# Altium PCB PCB1.PcbDoc
Units mm, origin at the board's own origin, x right, y up, seen from the top; angles counter-clockwise.
Board outline 84 x 87 mm, 2 copper layers (Top Layer, Bottom Layer); 54 components, 55 nets, 211 pads, 46 vias.
Unrouted connection lines stored in the file: 35.
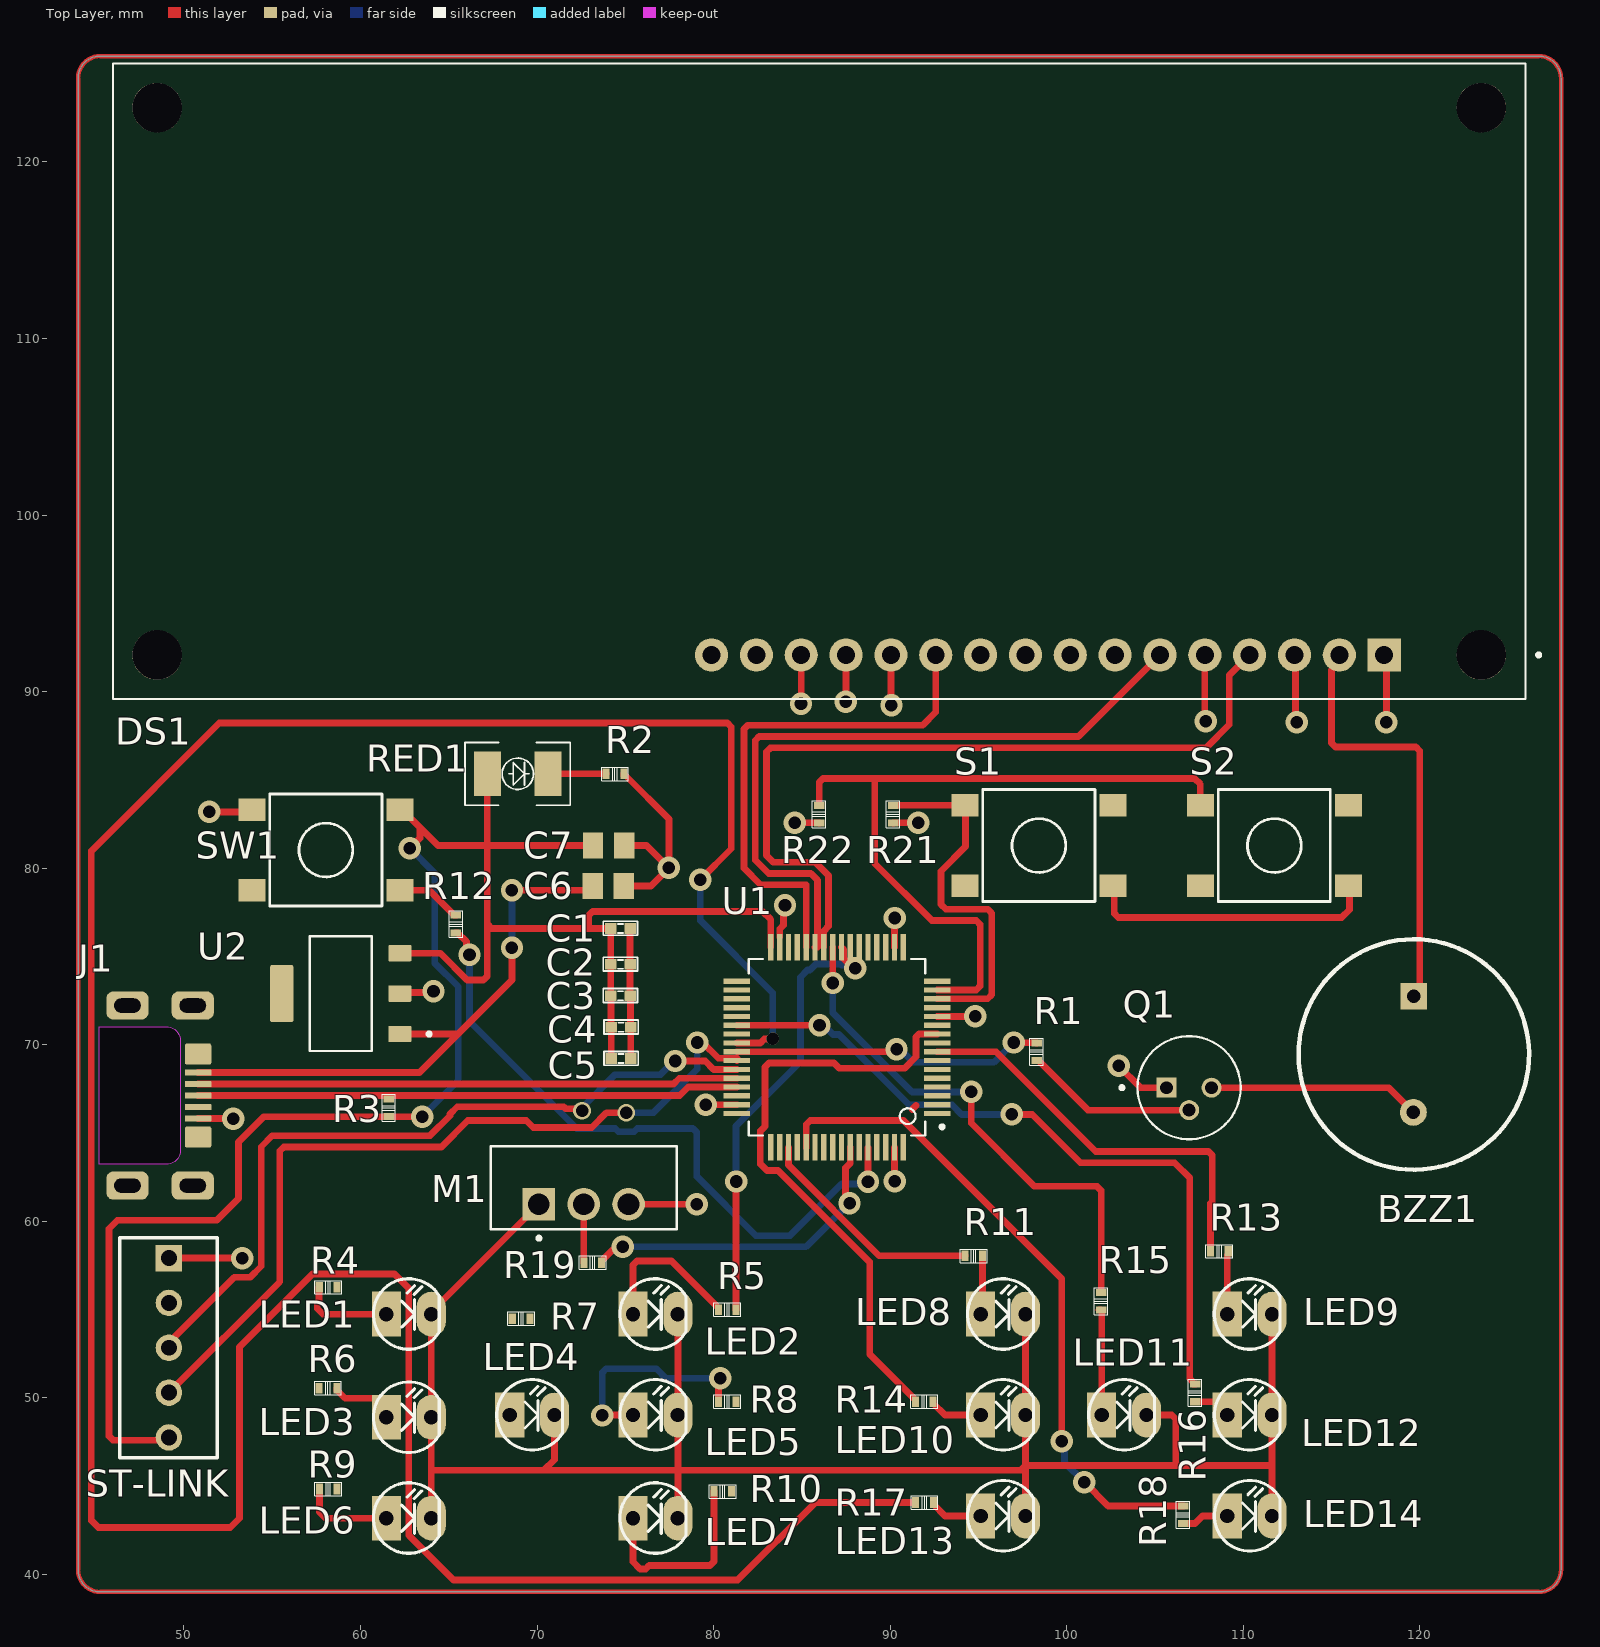
[diagram p0: Top Layer view]
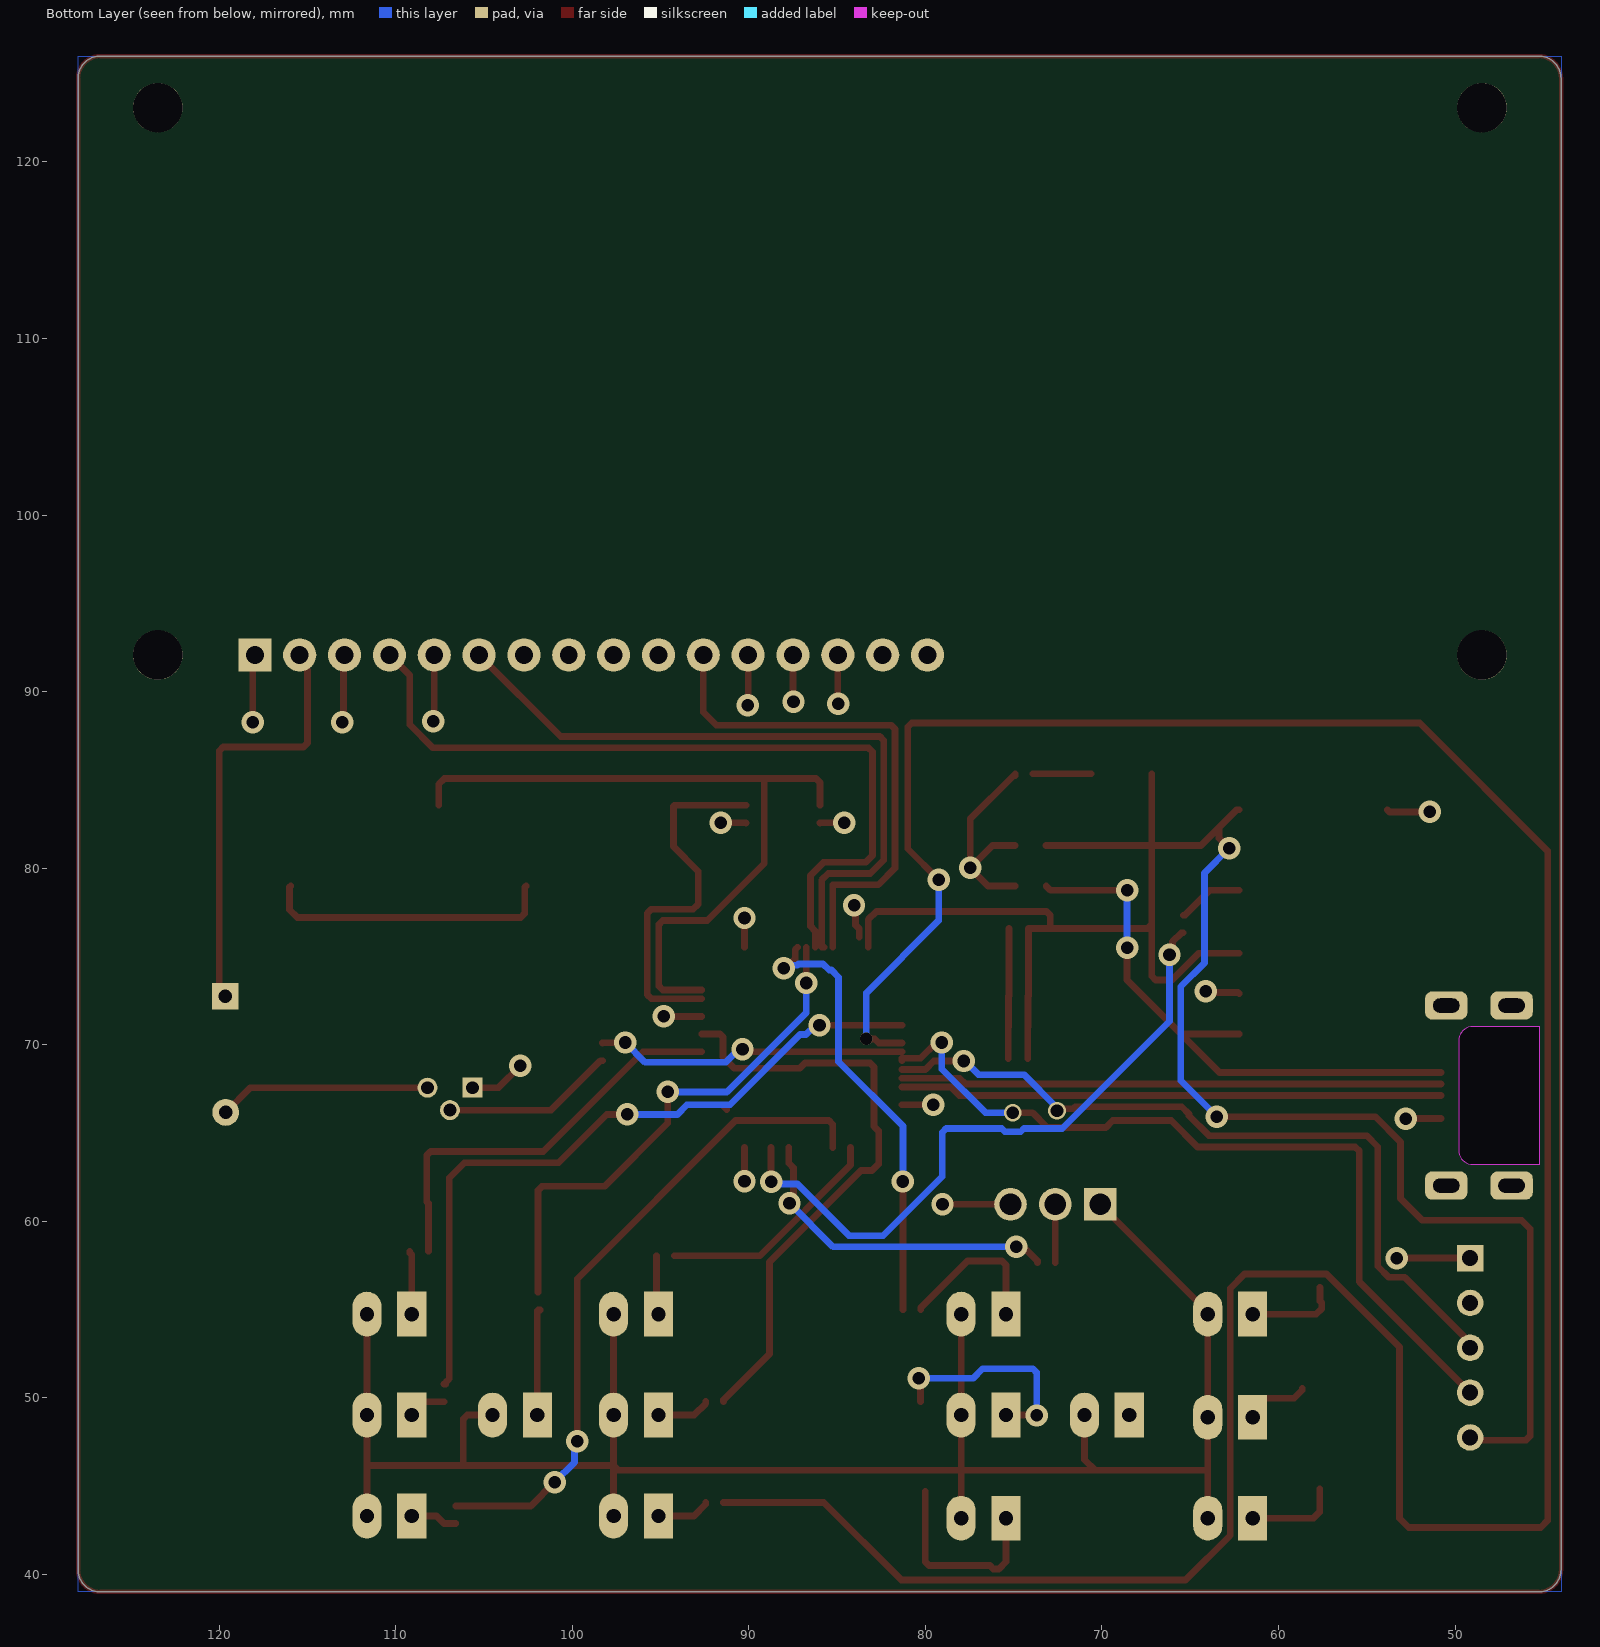
[diagram p1: Bottom Layer view, seen from below]
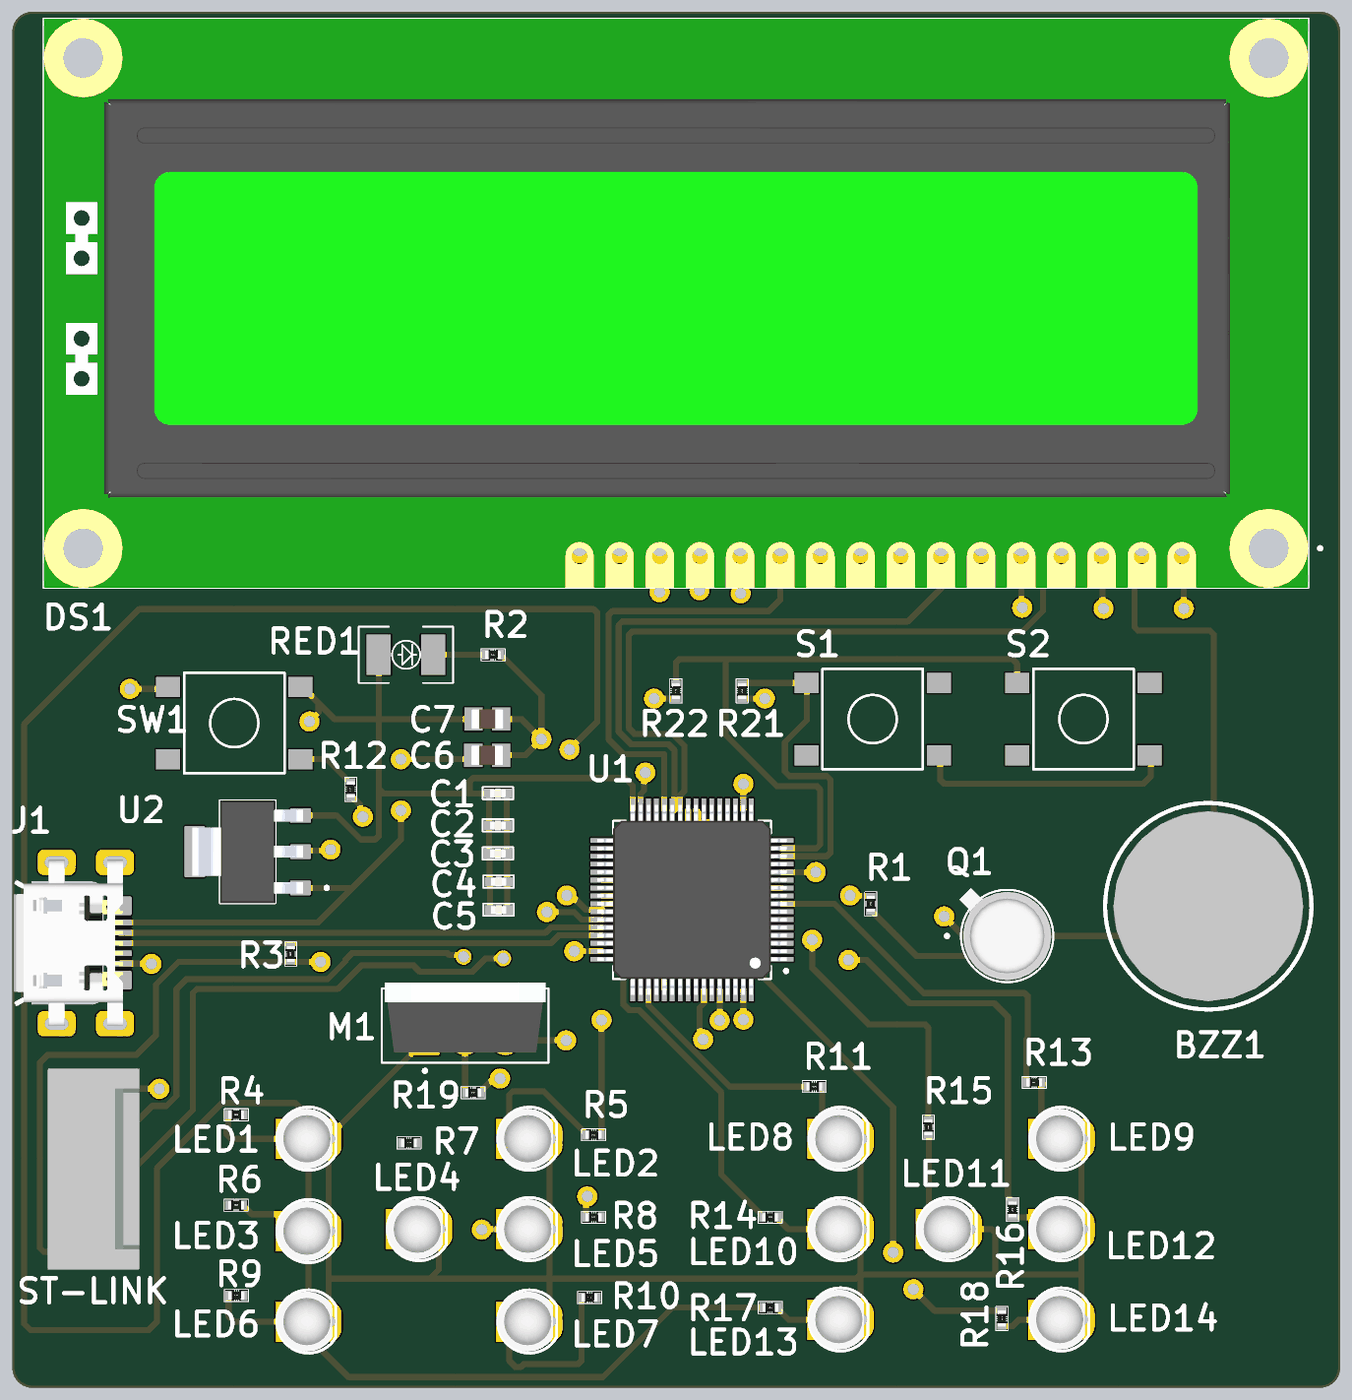
[diagram p2: 3D render of the assembled board from above, using the file's embedded part models]

## Layer stack, top to bottom
Top Solder: solder mask 0.0102, Solder Resist, Dk 3.5
Top Layer: signal copper 0.0356
Dielectric 1: dielectric 0.32, FR-4, Dk 4.8
Bottom Layer: signal copper 0.0356
Bottom Solder: solder mask 0.0102, Solder Resist, Dk 3.5

## Board outline
44,40.27 ccw(c45.27,40.27) 45.27,39 126.73,39 ccw(c126.73,40.27) 128,40.27 128,124.73 ccw(c126.73,124.73) 126.73,126 45.27,126 ccw(c45.27,124.73) 44,124.73

## Design rules (kind name [scope] priority, off if disabled: settings)
Clearance [All] p1: gap=0.254 ignorepadtopadclearanceinfootprint=FALSE
PolygonConnect [All] p1: connectstyle=Relief reliefconductorwidth=0.254 reliefentries=4 polygonreliefangle="90 Angle" airgapwidth=0.254
RoutingVias [All] p1: holewidth=0.711 width=1.27 viastyle="Through Hole" minholewidth=0.711 minwidth=1.27 maxholewidth=0.711 maxwidth=1.27
SolderMaskExpansion [All] p1: expansion=0.102 istentingtop=FALSE
SupplyNets "Schematic Supply Nets_4" [InNet('VBUS')] p1: voltage=0.000
SupplyNets "Schematic Supply Nets_3" [InNet('+5V')] p2: voltage=0.000
SupplyNets "Schematic Supply Nets_2" [InNet('GND')] p3: voltage=0.000
SupplyNets "Schematic Supply Nets_1" [InNet('+5')] p4: voltage=0.000
SupplyNets "Schematic Supply Nets" [InNet('+3.3V')] p5: voltage=0.000
Width [All] p1: maxlimit=0.5 minlimit=0.254 preferedwidth=0.3
30 further rules are at their usual default settings.

## Components (designator, comment, footprint, x,y, rotation, side; value= is the part's Value field where it differs from the comment)
BZZ1 "Buzzer" "buzzer 5V" 119.659,69.444 r270 top
C1 "Capacitor" "tu 0402" 74.718,76.581 r0 top value=10u
C2 "Capacitor" "tu 0402" 74.718,74.549 r0 top value=100n
C3 "Capacitor" "tu 0402" 74.718,72.771 r0 top value=100n
C4 "Capacitor" "tu 0402" 74.761,70.993 r0 top value=100n
C5 "Capacitor" "tu 0402" 74.761,69.215 r0 top value=100n
C6 "Capacitor" CAPC2012X94N 74.041,78.994 r0 top value=22u
C7 "Capacitor" CAPC2012X94N 74.05,81.28 r0 top value=22u
DS1 "LM016L" MODULE_LCD-16X2 85.983,107.575 r180 top
J1 "USB M" USB-Micr-B-FCI-SMD 45.2,67.119 r270 top
LED1 "LED" LED-3 61.468,54.737 r0 top value="LED 3 ly Single Colour"
LED2 "LED" LED-3 75.438,54.737 r0 top value="LED 3 ly Single Colour"
LED3 "LED" LED-3 61.468,48.895 r0 top value="LED 3 ly Single Colour"
LED4 "LED" LED-3 68.453,49.022 r0 top value="LED 3 ly Single Colour"
LED5 "LED" LED-3 75.438,49.022 r0 top value="LED 3 ly Single Colour"
LED6 "LED" LED-3 61.468,43.18 r0 top value="LED 3 ly Single Colour"
LED7 "LED" LED-3 75.438,43.18 r0 top value="LED 3 ly Single Colour"
LED8 "LED" LED-3 95.123,54.737 r0 top value="LED 3 ly Single Colour"
LED9 "LED" LED-3 109.093,54.737 r0 top value="LED 3 ly Single Colour"
LED10 "LED" LED-3 95.123,49.022 r0 top value="LED 3 ly Single Colour"
LED11 "LED" LED-3 101.981,49.022 r0 top value="LED 3 ly Single Colour"
LED12 "LED" LED-3 109.093,49.022 r0 top value="LED 3 ly Single Colour"
LED13 "LED" LED-3 95.123,43.307 r0 top value="LED 3 ly Single Colour"
LED14 "LED" LED-3 109.093,43.307 r0 top value="LED 3 ly Single Colour"
M1 "N-channel MOS1 MOSFET Shichman and Hodges Model" TO254P1054X469X1930-3 72.644,61.9 r0 top
Q1 "2N2222A" TO127P584H533-3 106.934,67.564 r0 top
R1 "1K" RES-SMD-0402 98.298,69.596 r90 top
R2 "Thick Film" RES-SMD-0402 74.414,85.344 r180 top value=1k5
R3 "Thick Film" RES-SMD-0402 61.6,66.425 r90 top value=1k5
R4 "220" RES-SMD-0402 58.166,56.261 r0 top
R5 "220" RES-SMD-0402 80.772,54.991 r0 top
R6 "220" RES-SMD-0402 58.158,50.546 r180 top
R7 "220" RES-SMD-0402 69.096,54.483 r0 top
R8 "220" RES-SMD-0402 80.772,49.784 r0 top
R9 "220" RES-SMD-0402 58.174,44.831 r0 top
R10 "220" RES-SMD-0402 80.518,44.704 r0 top
R11 "220" RES-SMD-0402 94.734,58.039 r180 top
R12 "Thick Film" RES-SMD-0402 65.405,76.835 r90 top value=10K
R13 "220" RES-SMD-0402 108.65,58.3 r0 top
R14 "220" RES-SMD-0402 91.94,49.784 r0 top
R15 "220" RES-SMD-0402 101.95,55.475 r270 top
R16 "220" RES-SMD-0402 107.275,50.275 r270 top
R17 "220" RES-SMD-0402 91.948,44.069 r0 top
R18 "220" RES-SMD-0402 106.6,43.375 r270 top
R19 "Resistor" RES-SMD-0402 73.152,57.658 r0 top value=10K
R21 "Resistor" RES-SMD-0402 90.17,83.058 r90 top value=10K
R22 "Resistor" RES-SMD-0402 85.979,83.058 r90 top value=10K
RED1 "Light-Emitting Diode" LED-RED-0805 67.183,85.344 r0 top
S1 "Push Button Normally Opened" SW4_SMD 98.425,81.28 r0 top
S2 "Push Button Normally Opened" SW4_SMD 111.76,81.28 r0 top
ST-LINK "ST-LINK" HDR5 49.149,57.912 r270 top (schematic designator C8)
SW1 "ON-ON" SW4_SMD 58.039,81.026 r0 top
U1 "STM32F401RET6TR" QFP50P1200X1200X160-64N 86.995,69.85 r180 top
U2 "Positive Fixed Voltage regulator" AMS1117_3v3 58.758,72.386 r180 top

## Footprints (in the part's own frame and the unit in brackets; to place one, negate y for a bottom-side part, rotate by r counter-clockwise, add the part's x,y. Pads: shape width x height; smd on the part's side, far side on the other; paste and mask are expansions set on the pad)
AMS1117_3v3 [mm]
  rrect15% 1.31x0.93 smd: 1(-3.472,1.782) 2(-3.472,-0.508) 3(-3.472,-2.798)
  rrect15% 1.31x3.24 smd: 4(3.218,-0.508)
  silkscreen extent -5.23,-3.76 1.63,2.74, body extent -3.63,-3.76 3.37,2.74, height 1.8
"buzzer 5V" [mil]
  rect 60x60 hole 30: 1(-130,0)
  round 60 hole 30: 2(129,-1)
  silkscreen extent -257,-257 257,257, body extent -236,-236 236,236, height 345
CAPC2012X94N [mm]
  rect 1.16x1.47 smd: 1(-0.88,0) 2(0.88,0)
  body extent -1,-0.63 1,0.63, height 0.94
HDR5 [mm] "Connector; Header; 5 Position"
  rect 1.5x1.5 hole 0.9: 1(0,0)
  round 1.5 hole 0.9: 2(2.54,0) 3(5.08,0) 4(7.62,0) 5(10.16,0)
  silkscreen extent -1.14,-2.79 11.3,2.74, body extent -1.27,-2.92 11.43,2.88, height 11.72
LED-3 [mil] "LED 2 PIN, 3ly Only colour"
  rect 65x100 hole 32: 1(0,0)
  oval 65x100 hole 32: 2(100,0)
  silkscreen extent -29,-78 118,79, body extent -29,-75 109,75, height 256
LED-RED-0805 [mil]
  rect 60x100 smd: 1(0,0) 2(135,0)
  silkscreen extent -50,-70 185,70, body extent -20,-60 154,60, height 75
MODULE_LCD-16X2 [mm]
  rect 1.88x1.88 / inner round 1.88 / far side rect 1.88x1.88 hole 1.016: 1(-32,15.5)
  round 1.88 hole 1.016: 2(-29.46,15.5) 3(-26.92,15.5) 4(-24.38,15.5) 5(-21.84,15.5) 6(-19.3,15.5) 7(-16.76,15.5) 8(-14.22,15.5) 9(-11.68,15.5) 10(-9.14,15.5) 11(-6.6,15.5) 12(-4.06,15.5) 13(-1.52,15.5) 14(1.02,15.5) 15(3.56,15.5) 16(6.1,15.5)
  round 2.8 hole 2.8 unplated: ""(-37.5,-15.5) ""(-37.5,15.5) ""(37.5,-15.5) ""(37.5,15.5)
  silkscreen extent -40.85,-18 40,18, body extent -40,-18 40,18, height 10.2
QFP50P1200X1200X160-64N [mm]
  rect 1.5x0.3 smd: 1(-5.67,3.75) 2(-5.67,3.25) 3(-5.67,2.75) 4(-5.67,2.25) 5(-5.67,1.75) 6(-5.67,1.25) 7(-5.67,0.75) 8(-5.67,0.25) 9(-5.67,-0.25) 10(-5.67,-0.75) 11(-5.67,-1.25) 12(-5.67,-1.75) 13(-5.67,-2.25) 14(-5.67,-2.75) 15(-5.67,-3.25) 16(-5.67,-3.75) 33(5.67,-3.75) 34(5.67,-3.25) 35(5.67,-2.75) 36(5.67,-2.25) 37(5.67,-1.75) 38(5.67,-1.25) 39(5.67,-0.75) 40(5.67,-0.25) 41(5.67,0.25) 42(5.67,0.75) 43(5.67,1.25) 44(5.67,1.75) 45(5.67,2.25) 46(5.67,2.75) 47(5.67,3.25) 48(5.67,3.75)
  rect 0.3x1.5 smd: 17(-3.75,-5.67) 18(-3.25,-5.67) 19(-2.75,-5.67) 20(-2.25,-5.67) 21(-1.75,-5.67) 22(-1.25,-5.67) 23(-0.75,-5.67) 24(-0.25,-5.67) 25(0.25,-5.67) 26(0.75,-5.67) 27(1.25,-5.67) 28(1.75,-5.67) 29(2.25,-5.67) 30(2.75,-5.67) 31(3.25,-5.67) 32(3.75,-5.67) 49(3.75,5.67) 50(3.25,5.67) 51(2.75,5.67) 52(2.25,5.67) 53(1.75,5.67) 54(1.25,5.67) 55(0.75,5.67) 56(0.25,5.67) 57(-0.25,5.67) 58(-0.75,5.67) 59(-1.25,5.67) 60(-1.75,5.67) 61(-2.25,5.67) 62(-2.75,5.67) 63(-3.25,5.67) 64(-3.75,5.67)
  silkscreen extent -6.05,-5 5,5, body extent -6,-6 6,6, height 1.6
RES-SMD-0402 [mm]
  rect 0.4x0.6 smd: 1(-0.5,0) 2(0.5,0)
  silkscreen extent -0.76,-0.38 0.76,0.38, body extent -0.5,-0.25 0.5,0.25, height 0.35
SW4_SMD [mil] "SW SMD button 4pin, 250 x250 mil"
  rect 60x50 smd: 1(-165,90) 2(165,-90) 3(165,90) 4(-165,-90)
  silkscreen extent -125,-125 125,125, body extent -180,-125 180,125, height 130
TO127P584H533-3 [mm]
  rect 1.13x1.13 / inner round 1.13 / far side rect 1.13x1.13 hole 0.73 mask+0.102: 1(-1.27,0)
  round 1.13 hole 0.73 mask+0.102: 2(0,-1.27) 3(1.27,0)
  silkscreen extent -3.91,-2.92 2.92,2.92, body extent -3.02,-2.79 2.79,3.02, height 5.33
TO254P1054X469X1930-3 [mm]
  rect 1.85x1.85 / inner round 1.85 / far side rect 1.85x1.85 hole 1.23: 1(-2.54,-0.94)
  round 1.85 hole 1.23: 2(0,-0.94) 3(2.54,-0.94)
  silkscreen extent -5.27,-2.96 5.27,2.35, body extent -5.08,-1.71 5.08,2.73, height 15.01
"tu 0402" [mm]
  rect 0.65x0.6 smd: 1(-0.55,0) 2(0.55,0)
  silkscreen extent -0.97,-0.38 0.97,0.41, body extent -0.5,-0.27 0.5,0.26, height 0.35
USB-Micr-B-FCI-SMD [mm]
  round 0.508 on Mech15: 0(0,0)
  rrect20% 0.35x1.5 smd: 1(-1.3,5.6) 2(-0.65,5.6) 3(0,5.6) 4(0.65,5.6) 5(1.3,5.6)
  rrect50% 1.6x2.4 hole 0.8 slot 1.5 at 90 deg: SH(-5.1,5.3) SH(-5.1,1.6) SH(5.1,5.3) SH(5.1,1.6)
  rrect20% 1.2x1.5 smd: SH(-2.35,5.6) SH(2.35,5.6)
  Keep-Out Layer board cut-out: -3.9,0 -3.9,3.797 -3.839,4.103 -3.666,4.362 -3.406,4.536 -3.1,4.597 -3.1,4.597 3.1,4.597 3.406,4.536 3.666,4.362 3.839,4.103 3.9,3.797 3.9,3.797 3.9,0
  body extent -5.25,-1.12 5.25,5.8, height 2.15

## Part data
DS1: "Display Lcd 35x75mm", PACKAGE=None, Availability="Not in stock", Check_prices=https://www.snapeda.com/parts/LM016L/Hitachi/view-part/?ref=eda, MF=Hitachi, MP=LM016L, Price=None, SnapEDA_Link=https://www.snapeda.com/parts/LM016L/Hitachi/view-part/?ref=snap
LED1 LED2 LED3 LED4 LED5 LED6 LED7 LED8 LED9 LED10 LED11 LED12 LED13 LED14: "LED Single colour Green and Red"
M1: library part "MOSFET N-ch Lev1", CBD=0, CBS=0, CGBO=0, CGDO=0, CGSO=0, CJ=0, CJSW=0, FC=0.5, GAMMA=0, IS=1e-14, JS=0, KP=2e-05, LAMBDA=0, LD=0, MJ=0.5, MJSW=0.5, NSS=0, NSUB=0, PB=0.8, PHI=0.6, RD=0, RS=0, RSH=0, SimulationGenericComponent=True, TNOM=27, TOX=0, TPG=0, U0=0, VTO=0
Q1: "Bipolar (BJT) Transistor NPN 50 V 800 mA - 500 mW Surface Mount 4-SMD", PACKAGE=None, Check_prices=https://www.snapeda.com/parts/2N2222A/Microsemi/view-part/?ref=eda, MF="Microsemi Corporation", MP=2N2222A, SnapEDA_Link=https://www.snapeda.com/parts/2N2222A/Microsemi/view-part/?ref=snap
R1 R4 R5 R6 R7 R8 R9 R10 R11 R13 R14 R15 R16 R17 R18: library part Res, "Res"
R2 R3 R12: library part RES_0402, "Resistor SMD chip 1k Ohm 0.063W 5% 0402", Manufacturer 1=Yageo, Manufacturer 2="Vishay Dale", Manufacturer 3="Samsung Electro-Mechanics America, Inc", Manufacturer 4="Rohm Semiconductor", Manufacturer 5="Panasonic Electronic Components", Manufacturer Part Number 1=RC0402JR-071KL, Manufacturer Part Number 2=CRCW04021K00JNED, Manufacturer Part Number 3=RC1005J102CS, Manufacturer Part Number 4=MCR01MRTJ102, Manufacturer Part Number 5=ERJ-2GEJ102X, Package / Case="0402 (1005 Metric)", Ratings="1/16 W", Supplier Part Number 1=311-1.0KJRCT-ND, Tolerance=±5%, ComponentLink1Description=http://www.yageo.com/documents/recent/PYu-RC0402_51_RoHS_L_6.pdf, ComponentLink1URL=http://www.yageo.com/documents/recent/PYu-RC0402_51_RoHS_L_6.pdf, ComponentLink2Description=http://www.vishay.com/doc?20035, ComponentLink2URL=http://www.vishay.com/doc?20035, ComponentLink3Description=http://www.samsungsem.com/servlet/FileDownload?filename=productcatalog/pdf/Chip_Resistor.pdf, ComponentLink3URL=http://www.samsungsem.com/servlet/FileDownload?filename=productcatalog/pdf/Chip_Resistor.pdf, ComponentLink4Description=http://rohmfs.rohm.com/en/products/databook/datasheet/passive/resistor/chip_resistor/mcr_g.pdf, ComponentLink4URL=http://rohmfs.rohm.com/en/products/databook/datasheet/passive/resistor/chip_resistor/mcr_g.pdf, ComponentLink5Description=http://industrial.panasonic.com/www-cgi/jvcr13pz.cgi?E+PZ+3+AOA0001+ERJ2GEJ102X+7+WW, ComponentLink5URL=http://industrial.panasonic.com/www-cgi/jvcr13pz.cgi?E+PZ+3+AOA0001+ERJ2GEJ102X+7+WW, RoHS 1="RoHS Compliant", RoHS 2="RoHS Compliant", RoHS 3="RoHS Compliant", RoHS 4="RoHS Compliant", RoHS 5="RoHS Compliant", SCDType=spec, Supplier 1=Digi-Key, Supplier 2=Digi-Key, Supplier 3=Digi-Key, Supplier 4=Digi-Key, Supplier 5=Digi-Key, Supplier Part Number 2=541-1.0KJCT-ND, Supplier Part Number 3=1276-4376-1-ND, Supplier Part Number 4=RHM1.0KCECT-ND, Supplier Part Number 5=P1.0KJCT-ND
RED1: library part LED, AF=1, BV=0, BV_MAX=1e99, CJO=0, CJP=0, CTA=0, CTP=0, EG=1.11, FC=0.5, FCS=0.5, FV_MAX=1e99, IBV=0.001, IKF=0, IKR=0, IS=1e-14, ISR=1e-14, JSW=0, JTUN=0, JTUNSW=0, KEG=1, KF=0, LEVEL=1, MJSW=0.33, N=1, NBV=1, NR=1, NS=1, NTUN=30, PHP=1, RS=0, SimulationGenericComponent=True, TCV=0, TLEV=0, TLEVC=0, TM1=0, TM2=0, TNOM=27, TPB=0, TPHP=0, TRS=0, TRS2=0, TT=0, TTT1=0, TTT2=0, VJ=1, XTI=3, XTITUN=3
S1 S2: library part "Push Button NO", closed=0, Rclosed=1m, Ropen=1Meg, SimulationGenericComponent=True
ST-LINK: library part Header5, "Header IDC, 5 x 1 Pin Vertical 2.54mm Pitch (Non-Boxed, Male)", Manufacturer="W¨¹rth Elektronik eiSos GmbH", partNo=613002143121, ComponentLink1 Description=Manufacturer, ComponentLink1URL=http://www.we-online.com, ComponentLink2 Description=Datasheet, ComponentLink2URL=http://katalog.we-online.de/em/datasheet/6130xx143121.pdf, Created by="Karrer Zheng", Created Date="29 March 2013", NoPins=02
SW1: library part SW_THD_SPDT_On-On, "Switch THD vertical toggle SPDT", Contact Rating @ Voltage="0.25A @ 125VAC", Manufacturer 1="TE Connectivity", Manufacturer Part Number 1=SLS121PC04, Supplier Part Number 1=450-1598-ND, Circuit=SPDT, Mounting Type="PCB mount", SCDType=spec, Supplier 1=Digi-Key, Switch Function=On-On
U1: "ARMÂ® CortexÂ®-M4 STM32F4 Microcontroller IC 32-Bit Single-Core 84MHz 512KB (512K x 8) FLASH 64-LQFP (10x10)", PACKAGE="LQFP-64 STMicroelectronics", Check_prices=https://www.snapeda.com/parts/STM32F401RET6TR/STMicroelectronics/view-part/?ref=eda, MF=STMicroelectronics, MP=STM32F401RET6TR, SnapEDA_Link=https://www.snapeda.com/parts/STM32F401RET6TR/STMicroelectronics/view-part/?ref=snap
U2: library part "Linear Voltage Regulator (Fixed)", R1_Value=1020, Av_feedback=1665, SimulationGenericComponent=True
C1 C2 C3 C4 C5 C6 C7: SimulationGenericComponent=True
R19 R21 R22: SimulationGenericComponent=True, TC1=0, TC2=0

## Via types
v1: diameter 1.27, hole 0.711, Top Layer to Bottom Layer, 43 vias
v2: diameter 1, hole 0.711, Top Layer to Bottom Layer, 2 vias
v3: diameter 0.711, hole 0.711, Top Layer to Bottom Layer, 1 vias

## Nets (pads, with @x,y where several pads share a name; then routed paths per layer and width w, separated by ;. In a path a pad name is that pad's centre, name@x,y a point inside that pad or via, vN(x,y) a via of type N, cw(c..) or ccw(c..) an arc to the next point about the centre after c; other vN are vias at no path point)
+3.3V: C1.1 C2.1 C3.1 C4.1 C5.1 C7.1 R3.1 RED1.1 ST-LINK.5 SW1.3 U1.1 U1.13 U1.19 U1.32 U1.48 U1.64 U2.3 | length 112.6
  Top Layer w0.381: ST-LINK.5 48.999,47.602 45.973,47.602 45.75,47.825 45.75,59.575 46.225,60.05 51.85,60.05 53.087,61.287 53.087,64.487 54.525,65.925 R3.1 v1(63.5,65.925) ; U2.3 64.516,75.184 66.04,73.66 66.96,73.66 67.183,73.883 67.183,76.835 ; SW1.3 62.357,83.312 63.373,82.296 ; v1(62.8,81.125) 63.373,81.698 63.373,82.296 ; RED1.1 67.183,81.407 ; C7.1 67.31,81.28 ; C5.1 C4.1 74.19,71.015 74.19,72.749 C3.1 C2.1 C1.1 72.925,76.581 ; U1.32 83.245,77.08 82.775,77.55 73.148,77.55 72.925,77.327 72.925,76.581 ; 63.373,82.296 64.389,81.28 67.31,81.28 ; 67.183,76.835 67.183,81.407 ; 67.183,76.835 67.437,76.581 72.925,76.581 ; 67.183,81.407 67.31,81.28
  Bottom Layer w0.381: v1(62.8,81.125) 64.2,79.725 64.2,74.625 65.54,73.285 65.54,67.965 v1(63.5,65.925)
+5: S1.2 S2.2 | length 16.6
  Top Layer w0.381: S1.2 102.7,78.91 102.7,77.423 102.923,77.2 115.575,77.2 116.017,77.642 116.017,78.928 S2.2
+5V: BZZ1.1 DS1.2 | length 24.4
  Top Layer w0.381: DS1.2 115.443,91.669 115,91.226 115,87.085 115.223,86.862 119.777,86.862 120,86.638 120,73.086 BZZ1.1
BUTT_1: R21.2 S1.1 U1.14 | length 21.2
  Top Layer w0.381: R21.2 94.226,83.558 94.275,83.509 94.275,81.225 92.875,79.825 92.875,77.95 93.15,77.675 95.527,77.675 95.75,77.452 95.75,72.823 95.527,72.6 U1.14
BUTT_2: R22.2 S2.1 U1.15 | length 42.5
  Top Layer w0.381: R22.2 85.979,84.852 86.202,85.075 89.125,85.075 ; U1.15 94.877,73.1 95.1,73.323 95.1,76.817 94.877,77.04 92.36,77.04 89.125,80.275 89.125,85.075 ; S2.1 107.569,84.756 107.25,85.075 89.125,85.075
BZZ: R1.2 U1.41 | length 17.8
  Top Layer w0.381: U1.41 90.225,69.6 v1(90.362,69.737) ; v1(97,70.125) 97.02,70.105 98.288,70.105 R1.2
  Bottom Layer w0.381: v1(90.362,69.737) 90.594,69.737 91.331,69 95.875,69 v1(97,70.125)
GND: C6.2 C7.2 DS1.1 DS1.3 DS1.5 J1.5 M1.3 Q1.1 R2.1 R21.1 R22.1 ST-LINK.1 SW1.1 U1.12 U1.18 U1.31 U1.47 U1.63 U2.2 | length 49.9
  Top Layer w0.381: J1.5 52.781,65.819 v1(52.8,65.8) ; v1(51.435,83.185) 53.721,83.185 SW1.1 ; U2.2 62.296,72.96 64.07,72.96 v1(64.135,73.025) ; R2.1 74.914,85.244 74.924,85.235 75.024,85.235 77.47,82.788 v1(77.47,80.01) ; C6.2 76.454,78.994 v1(77.47,80.01) ; C7.2 76.2,81.28 v1(77.47,80.01) ; M1.3 v1(79.035,60.96) v1@79.05,60.975 ; v1(79.55,66.6) U1.47 ; U1.31@83.745,76.08 83.745,76.549 83.965,76.769 83.965,77.815 v1(84.045,77.895) ; v1(84.6,82.575) 84.609,82.566 85.97,82.566 R22.1 ; R21.1 90.178,82.566 91.591,82.566 v1(91.6,82.575) ; U1.63 90.245,62.28 v1(90.25,62.275) ; U1.18 90.245,77.17 v1(90.25,77.175) ; U1.12 v1(94.825,71.6) ; v1(102.95,68.8) 104.186,67.564 Q1.1 ; DS1.5 107.823,88.392 v1@107.95,88.265 ; DS1.3 112.966,92.011 112.966,88.328 v1(113.03,88.265) ; DS1.1 118.11,91.948 v1(118.11,88.265)
  other v1: 53.3,57.9 107.886,88.328
LCD_D4: DS1.11 U1.28 | length 29.8
  Top Layer w0.381: U1.28 85.245,76.63 85.245,79.058 82.667,79.058 81.725,80 81.725,87.877 81.948,88.1 91.85,88.1 92.583,88.833 DS1.11
LCD_D5: DS1.12 U1.55 | length 2.9
  Top Layer w0.381: DS1.12 90.043,89.257 v1(90.075,89.225)
LCD_D6: DS1.13 U1.56 | length 2.7
  Top Layer w0.381: v1(87.475,89.425) 87.503,89.453 DS1.13
LCD_D7: DS1.14 U1.57 | length 2.8
  Top Layer w0.381: v1(84.95,89.3) 84.963,89.313 DS1.14
LCD_E: DS1.6 U1.27 | length 39.6
  Top Layer w0.381: U1.27 85.88,75.52 85.88,77.125 85.88,79.321 85.508,79.693 83.125,79.693 82.36,80.458 82.36,87.227 82.583,87.45 100.658,87.45 DS1.6
LCD_RS: DS1.4 U1.26 | length 45.3
  Top Layer w0.381: U1.26 86.245,76.445 86.515,76.714 86.515,79.584 85.771,80.328 83.388,80.328 83,80.716 83,86.592 83.223,86.815 107.9,86.815 109.205,88.12 109.205,90.917 DS1.4
LED_1: R13.1 U1.8 | length 23.5
  Top Layer w0.381: U1.8 95.998,69.6 101.648,63.95 108.027,63.95 108.25,63.727 108.25,61.114 108.15,61.013 R13.1
LED_2: R4.2 U1.9
LED_3: R14.1 U1.10 | length 34.8
  Top Layer w0.381: 91.247,66.335 91.47,66.558 ; R14.1 91.44,49.884 88.838,52.486 88.838,57.688 83.652,62.875 83.021,62.875 82.651,63.246 82.651,65.114 82.911,65.375 82.911,68.742 83.134,68.965 86.818,68.965 87.125,68.658 90.81,68.658 91.47,69.319 91.47,70.434 91.636,70.6 U1.10
LED_4: R10.2 U1.11
LED_5: R5.2 U1.24 | length 25.4
  Top Layer w0.381: R5.2 81.272,62.247 v1(81.275,62.25) ; U1.24 87.38,75.385 87.38,74.856 87.911,74.326 v1(88.024,74.326)
  Bottom Layer w0.381: v1(81.275,62.25) 81.275,65.39 84.921,69.036 84.921,73.822 85.324,74.225 85.45,74.225 85.799,74.574 87.192,74.574 87.271,74.496 87.854,74.496 v1(88.024,74.326)
LED_6: R15.1 U1.25 | length 29.9
  Top Layer w0.381: v1(86.745,73.495) U1.25 ; v1(94.6,67.325) 94.6,65.55 98.175,61.975 101.727,61.975 101.95,61.752 R15.1
  Bottom Layer w0.381: v1(86.745,73.495) 86.745,71.828 91.248,67.325 v1(94.6,67.325)
LED_7: R6.2 U1.37
LED_8: R16.1 U1.38 | length 41.1
  Top Layer w0.381: U1.38 v1(86,71.1) ; v1(96.9,66.05) 98.05,66.05 100.785,63.315 106.11,63.315 106.975,62.45 106.975,51.075 107.166,50.885 107.166,50.785 107.175,50.775 R16.1
  Bottom Layer w0.381: v1(86,71.1) 86.241,71.1 86.765,70.575 87.1,70.575 91.075,66.6 93.5,66.6 94.05,66.05 v1(96.9,66.05)
LED_9: R7.2 U1.39
LED_10: R17.1 U1.40 | length 175.2
  Top Layer w0.381: v1(79.25,79.35) 81,81.1 81,88.002 80.777,88.225 52,88.225 44.756,80.981 44.756,43.045 45.15,42.65 52.625,42.65 53.15,43.175 53.15,52.874 57.282,57.006 61.923,57.006 62.738,56.191 62.738,42.209 65.275,39.673 81.365,39.673 85.762,44.069 R17.1 ; U1.40 82.647,70.1 82.872,70.325 v3(83.35,70.325)
  Bottom Layer w0.381: v1(79.25,79.35) 79.25,77.025 83.35,72.925 v3(83.35,70.325)
LED_11: R11.2 U1.51 | length 13.1
  Top Layer w0.381: U1.51 84.245,63.18 89.386,58.039 R11.2
LED_12: R8.2 U1.52
LED_13: R18.1 U1.53 | length 37.8
  Top Layer w0.381: U1.53 85.245,65.209 85.25,65.214 85.25,65.477 85.473,65.7 90.754,65.7 99.725,56.729 v1(99.725,47.55) ; v1(101,45.225) 102.35,43.875 R18.1
  Bottom Layer w0.381: v1(99.725,47.55) 99.882,47.393 99.882,46.343 v1(101,45.225)
LED_14: R9.2 U1.2
MOS: R19.2 U1.58 | length 18.9
  Top Layer w0.381: R19.2 73.652,57.758 74.444,58.55 v1(74.85,58.55) ; v1(87.7,61.025) 87.475,61.25 87.475,63.025 87.745,63.295 U1.58
  Bottom Layer w0.381: v1(74.85,58.55) 85.225,58.55 v1(87.7,61.025)
NetBZZ1_2: BZZ1.2 Q1.3 | length 12
  Top Layer w0.381: Q1.3 118.237,67.564 BZZ1.2
NetC1_2: C1.2 C2.2 C3.2 C4.2 C5.2 | length 7.4
  Top Layer w0.381: C1.2 C2.2 C3.2 75.289,72.749 75.289,71.015 C4.2 C5.2
NetLED1_1: LED1.1 R4.1 | length 5.3
  Top Layer w0.381: R4.1 57.656,56.252 57.656,55.472 57.55,55.366 57.55,55.05 57.863,54.737 LED1.1
NetLED1_2: LED1.2 LED2.2 LED3.2 LED4.2 LED5.2 LED6.2 LED7.2 LED8.2 LED9.2 LED10.2 LED11.2 LED12.2 LED13.2 LED14.2 M1.1 | length 110.4
  Top Layer w0.381: LED6.2 64.008,46.038 ; M1.1 64.008,54.864 LED1.2 LED3.2 64.008,46.038 ; LED4.2 70.993,46.493 70.4,45.9 ; LED7.2 77.978,45.85 ; LED2.2 LED5.2 77.978,45.85 ; LED13.2 97.663,46.164 ; LED8.2 LED10.2 97.663,46.164 ; LED11.2 105.952,49.022 106.175,48.799 106.175,46.214 106.225,46.164 ; LED14.2 111.633,46.164 ; LED9.2 LED12.2 111.633,46.164 ; 64.008,46.038 64.146,45.9 70.4,45.9 ; 70.4,45.9 77.928,45.9 ; 77.928,45.9 97.398,45.9 97.663,46.164 ; 77.928,45.9 77.978,45.85 ; 97.663,46.164 106.225,46.164 ; 106.225,46.164 111.633,46.164
NetLED2_1: LED2.1 R5.1 | length 8.9
  Top Layer w0.381: LED2.1 75.438,57.527 75.661,57.75 77.613,57.75 80.272,55.091 R5.1
NetLED3_1: LED3.1 R6.1 | length 3.8
  Top Layer w0.381: R6.1 58.658,50.446 59.13,49.974 60.833,49.974 61.468,49.34 LED3.1
NetLED4_1: LED4.1 R7.1
NetLED5_1: LED5.1 R8.1 | length 12.6
  Top Layer w0.381: v1@73.675,48.975 73.722,49.022 LED5.1 ; R8.1 80.281,49.794 80.281,51.006 v1(80.375,51.1)
  Bottom Layer w0.381: v1(73.699,48.998) 73.699,51.427 73.922,51.65 76.753,51.65 77.303,51.1 v1(80.375,51.1)
NetLED6_1: LED6.1 R9.1 | length 5.2
  Top Layer w0.381: R9.1 57.674,43.526 58.02,43.18 LED6.1
NetLED7_1: LED7.1 R10.1 | length 11.4
  Top Layer w0.381: LED7.1 75.438,40.712 75.842,40.308 76.158,40.308 76.35,40.5 79.795,40.5 80.018,40.723 R10.1
NetLED8_1: LED8.1 R11.1 | length 3.3
  Top Layer w0.381: LED8.1 95.234,54.848 R11.1
NetLED9_1: LED9.1 R13.2 | length 3.6
  Top Layer w0.381: LED9.1 109.093,58.082 109.204,58.193 R13.2@109.204,58.293
NetLED10_1: LED10.1 R14.2 | length 3.1
  Top Layer w0.381: R14.2 92.44,49.684 93.102,49.022 LED10.1
NetLED11_1: LED11.1 R15.2 | length 6.1
  Top Layer w0.381: R15.2@101.825,54.975 101.925,54.975 101.981,54.919 LED11.1
NetLED12_1: LED12.1 R16.2 | length 2.2
  Top Layer w0.381: R16.2 108.458,49.775 109.093,49.14 LED12.1
NetLED13_1: LED13.1 R17.2 | length 3
  Top Layer w0.381: R17.2 92.448,43.969 93.11,43.307 LED13.1
NetLED14_1: LED14.1 R18.2 | length 2.7
  Top Layer w0.381: R18.2 106.61,42.885 107.274,42.885 107.696,43.307 LED14.1
NetM1_2: M1.2 R19.1 | length 3.3
  Top Layer w0.381: M1.2 72.648,60.956 72.648,57.662 R19.1
NetQ1_2: Q1.2 R1.1 | length 9.8
  Top Layer w0.381: R1.1 98.398,69.096 101.2,66.294 Q1.2
NetR2_2: R2.2 RED1.2 | length 3.3
  Top Layer w0.381: RED1.2 R2.2
NetR12_1: R12.1 U1.60 | length 37.8
  Top Layer w0.381: R12.1 65.505,76.335 66.005,75.835 66.005,75.27 v1(66.175,75.1) ; v1(88.745,62.23) U1.60
  Bottom Layer w0.381: v1(66.175,75.1) 66.175,71.325 72.25,65.25 74.423,65.25 74.603,65.07 75.497,65.07 75.677,65.25 78.827,65.25 79.05,65.027 79.05,62.525 82.39,59.185 84.333,59.185 87.253,62.105 88.62,62.105 v1(88.745,62.23)
SW_BOOT0: R12.2 SW1.2 | length 3.8
  Top Layer w0.381: SW1.2 63.9,78.74 65.305,77.335 R12.2
SWCLK: ST-LINK.3 U1.49 | length 33.3
  Top Layer w0.381: ST-LINK.3 49.149,53.124 52.846,56.821 53.747,56.821 54.38,57.453 54.38,64.22 55.005,64.845 63.947,64.845 65.075,65.973 65.075,66.077 65.482,66.484 71.521,66.484 71.636,66.368 72.432,66.368 v2(72.55,66.25)
SWDIO: ST-LINK.4 U1.46 | length 37.1
  Top Layer w0.381: ST-LINK.4 55.425,56.568 55.425,63.975 55.66,64.21 64.585,64.21 66.075,65.7 69.389,65.7 69.784,65.305 73.098,65.305 73.943,66.15 v2(75.05,66.15)
USB_D_N: J1.2 U1.44 | length 30.7
  Top Layer w0.381: J1.2 77.725,67.769 78.056,68.1 U1.44
USB_D_P: J1.3 R3.2 U1.45 | length 30.7
  Top Layer w0.381: J1.3 78.084,67.119 78.565,67.6 U1.45
VBUS: C6.1 J1.1 U2.1 | length 33
  Top Layer w0.381: J1.1 63.339,68.419 65.524,70.604 ; U2.1 65.524,70.604 ; v1(68.58,75.501) 68.58,73.66 65.524,70.604 ; v1(68.58,78.74) 72.907,78.74 C6.1
  Bottom Layer w0.381: v1(68.58,75.501) v1(68.58,78.74)
pads on no net: DS1. DS1.7 DS1.8 DS1.9 DS1.10 DS1.15 DS1.16 J1.0 J1.4 J1.SH S1.3 S1.4 S2.3 S2.4 ST-LINK.2 SW1.4 U1.3 U1.4 U1.5 U1.6 U1.7 U1.16 U1.17 U1.20 U1.21 U1.22 U1.23 U1.29 U1.30 U1.33 U1.34 U1.35 U1.36 U1.42 U1.43 U1.50 U1.54 U1.59 U1.61 U1.62 U2.4
copper on no net: | length 363.3
  Top Layer w0.254: 44,40.27 ccw(c45.27,40.27) 45.27,39 80,39 126.73,39 ccw(c126.73,40.27) 128,40.27 128,124.73 ccw(c126.73,124.73) 126.73,126 45.27,126 ccw(c45.27,124.73) 44,124.73 44,40.27
  Top Layer w0.381: 49.149,57.912 53.288,57.912 53.3,57.9 ; v1(77.825,69.075) 79.528,69.075 80.004,68.6 81.325,68.6 ; v1(79.075,70.125) 79.377,70.125 80.267,69.235 81.325,69.235 81.325,69.1
  Bottom Layer w0.381: 72.6,66.484 74.416,68.3 77,68.3 77.775,69.075 v1(77.825,69.075) ; 75.05,66.15 76.6,66.15 79.075,68.625 v1(79.075,70.125)

## Polygon pours and split planes (outlines as drawn)
VBUS on Bottom Layer "COPPER " (solid, pour order 0): 128,126 44,126 44,39 128,39